# EAGLE board butt_blaster_mk_1 (EAGLE 6.5.0)

Size 44 x 40 mm. Coordinates in mm from the lower left corner, seen from the top.
Outline: 0,0 44,0 44,40 0,40 0,0
Copper layers (1*16): Top 0.035mm / dielectric 1.5mm / Bottom 0.035mm
Design rules "default": minimum track width 10mil, minimum drill 24mil, track to track 8mil, track to pad 8mil, pad to pad 8mil, via to via 8mil, smd to smd 8mil, copper to edge 40mil, drill to drill 8mil, minimum pad ring 10mil, minimum via ring 8mil, stop-mask expansion 4mil, vias tented up to drill 0mil, thermal gap 10mil

## Footprints (pad centres in the part's own frame; a part is rotated, then mirrored left to right if it is on the bottom)
RB1A-NOSUCK = drill 1.2 pad 1.778 square: + -2.54,2.54 | drill 1.2 pad 1.778 octagon: - 2.54,-2.54; AC1 2.54,2.54; AC2 -2.54,-2.54
C025-024X044 = drill 0.813 pad 1.5 octagon: 1 -1.27,0; 2 1.27,0
XC10B5 = drill 0.9 pad 1.5 octagon: 1 -5.08,0; 2 5.08,0
DIODE-7.68MM = drill 1 pad 1.778 octagon: A -3.81,0; K 3.81,0
TR5 = drill 1 pad 1.8: 1 -2.54,0; 2 2.54,0
HOLE-#2 = drill 2.8 pad 3.81: P$1 0,0
TO-92 = drill 0.9 pad 1.5 octagon: 1 -1.27,-0.5; 2 0,1.405; 3 1.27,-0.5
SCREWTERMINAL-5MM-2 = drill 1.3 pad 2.032: 1 -2.5,0; 2 2.5,0
RLB0912 = drill 1 pad 1.778 square: 1 2.54,0 | drill 1 pad 1.778 octagon: 2 -2.54,0
INDUCTOR-AXIAL-PTH-10.16MM = drill 1.27 pad 1.93 octagon: P$1 -5.08,0; P$2 5.08,0
LED5MM_SHORTPADS = drill 0.9 pad 1.5 octagon: A -1.27,0; K 1.27,0
VAR-5.08MM-PTH = drill 1 pad 1.778 octagon: 1 -2.54,0; 2 2.54,0

## Placement (x,y rotation side)
B1  [RB1A-NOSUCK]  12.5,5 0 top
C1  [C025-024X044]  30.5,2.5 270 top
C2  [C025-024X044]  42,13 270 top
CX1  0.1uF  [XC10B5]  20.5,6.5 270 top
CX2  0.1uF  [XC10B5]  26,6.5 270 top
D1  [DIODE-7.68MM]  30.5,10.5 90 top
F1  250mA(?)  [TR5]  4.5,16.5 90 top
H1  HOLE#2  [HOLE-#2]  2.5,37.5 0 top
H2  HOLE#2  [HOLE-#2]  41.5,2.5 0 top
IC1  HV9922  [TO-92]  34.5,4 180 top
JP1  M025MM  [SCREWTERMINAL-5MM-2]  4.5,6 90 top
L1  10mH  [RLB0912]  36.5,11 270 top
L2  10mH  [INDUCTOR-AXIAL-PTH-10.16MM]  20.5,14.5 0 top
LED1  LED5MM_SHORTPADS  [LED5MM_SHORTPADS]  27.86,19.18 180 top
LED2  LED5MM_SHORTPADS  [LED5MM_SHORTPADS]  21.71,19.18 180 top
LED3  LED5MM_SHORTPADS  [LED5MM_SHORTPADS]  15.68,18.94 90 top
LED4  LED5MM_SHORTPADS  [LED5MM_SHORTPADS]  15.68,25.09 90 top
LED5  LED5MM_SHORTPADS  [LED5MM_SHORTPADS]  21.99,25.17 0 top
LED6  LED5MM_SHORTPADS  [LED5MM_SHORTPADS]  28.33,25.14 90 top
LED7  LED5MM_SHORTPADS  [LED5MM_SHORTPADS]  28.33,31.29 90 top
LED8  LED5MM_SHORTPADS  [LED5MM_SHORTPADS]  22.06,31.33 180 top
LED9  LED5MM_SHORTPADS  [LED5MM_SHORTPADS]  15.83,31.59 90 top
MOV1  [VAR-5.08MM-PTH]  12.5,11 0 top

## Library data of the parts
B1 C1 C2 CX1 CX2 D1 F1 H1 H2 IC1 JP1 L1 L2 LED1-LED9 MOV1 = A_butts

## Nets
AC(L): F1.1 JP1.2
AC(N): B1.AC2 JP1.1 MOV1.1
GND: B1.- C1.2 CX1.2 CX2.2 IC1.2
N$1: LED1.K LED2.A
N$2: LED2.K LED3.A
N$3: LED4.K LED5.A
N$4: LED5.K LED6.A
N$5: LED3.K LED4.A
N$6: LED6.K LED7.A
N$7: LED7.K LED8.A
N$8: LED8.K LED9.A
N$9: C2.2 L1.2 LED9.K
N$10: D1.A IC1.1 L1.1
N$11: C2.1 CX2.1 D1.K L2.P$2 LED1.A
N$12: B1.AC1 F1.2 MOV1.2
N$13: B1.+ CX1.1 L2.P$1
N$14: C1.1 IC1.3

## Tracks (layer width: path | path; a pad name or v marks a point on that pad's centre or on a via)
AC(L)  (1 unrouted)
AC(N)  (2 unrouted)
GND  (4 unrouted)
N$1  (1 unrouted)
N$2  (1 unrouted)
N$3  (1 unrouted)
N$4  (1 unrouted)
N$5  (1 unrouted)
N$6  (1 unrouted)
N$7  (1 unrouted)
N$8  (1 unrouted)
N$9  (2 unrouted)
N$10  (2 unrouted)
N$11  (4 unrouted)
N$12  (2 unrouted)
N$13  (2 unrouted)
N$14  (1 unrouted)